# Altium PCB Apollo_ES_Board-V1.1 1.PcbDoc (part 3 of 3)
Units mil, origin at the board's own origin, x right, y up, seen from the top; angles counter-clockwise.
Board outline 984.25 x 614.17 mil, 4 copper layers (Top, Inner Layer 2, Inner Layer 3, Bottom), stack 4.71 mil thick; 86 components, 58 nets, 348 pads, 1209 vias.
Unrouted connection lines stored in the file: 448.
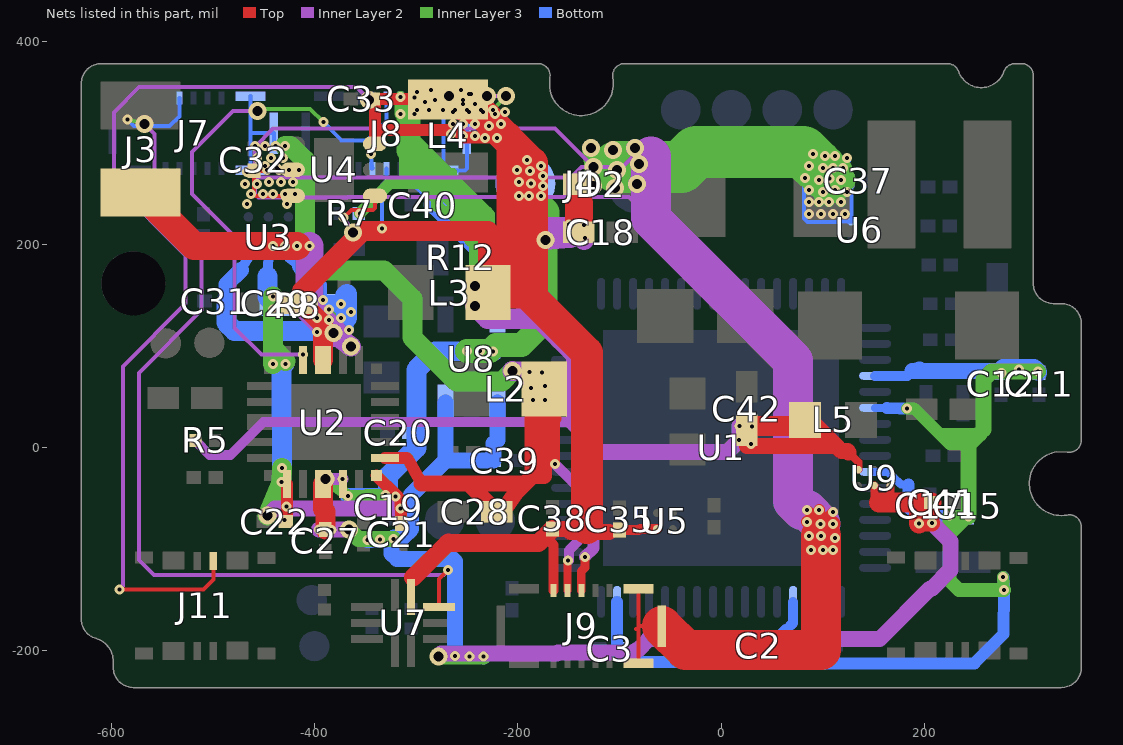
[diagram p5: the nets of this part, all layers, seen from the top]

## Via types
v1: diameter 9.84, hole 3.94, Top to Inner Layer 2, 528 vias
v2: diameter 9.84, hole 3.94, Inner Layer 3 to Bottom, 478 vias
v3: diameter 17.72, hole 9.84, Inner Layer 2 to Inner Layer 3, 198 vias
v4: diameter 17.72, hole 9.84, Top to Bottom, 5 vias

## Nets (pads, with @x,y where several pads share a name; then routed paths per layer and width w, separated by ;. In a path a pad name is that pad's centre, name@x,y a point inside that pad or via, vN(x,y) a via of type N, cw(c..) or ccw(c..) an arc to the next point about the centre after c; other vN are vias at no path point) (continued)
SW1_VDD1V8: C28.1 J7.13 J7.14 J7.16 J9.9 L2.2 U2.19 | length 1290.2
  Top w3.94: v1(-188.68,74.46) -174.16,59.94 v1(-173.23,61.02) ; L2.2@-176.29,58.03 v1(-176.29,73.92)
  Top w7.87: J9.9@-151.4,-140.49 -151.4,-111.52 v1(-150.6,-110.72)
  Top w9.84: v1(-173.23,47.24) L2.2@-174.16,45.42 ; v1(-173.23,61.02) L2.2@-174.16,58.03 ; v1(-163.38,-16.21) -163.38,27.19 -162.12,28.45 L2.2@-162.12,33.38 ; L2.2@-174.16,45.42 L2.2@-174.16,58.03 ; L2.2@-174.16,45.42 L2.2@-162.12,33.38 ; L2.2@-174.16,58.03 L2.2@-162.12,33.38
  Top w11.48: L2.2@-176.29,58.03 L2.2@-174.16,58.03
  Top w11.81: U2.19@-330.9,-10.13 -309.17,-10.13 -294.73,-35.2
  Top w11.94: L2.2@-174.16,58.03 L2.2@-174.16,59.94
  Top w12.09: L2.2@-174.16,45.42 L2.2@-174.16,47.24
  Top w13.89: L2.2@-174.16,47.24 v1(-173.23,47.24)
  Top w14.29: L2.2@-185.51,46.69 v1(-185.04,47.24)
  Top w15.75: -294.73,-35.2 -248.43,-35.2 ; v1(-185.04,47.24) L2.2@-174.16,58.03 ; L2.2@-174.16,45.42 -174.16,-27.55 -185.51,-27.55 ; L2.2@-174.16,47.24 L2.2@-174.16,58.03 ; -248.43,-35.2 C28.1@-220.78,-62.82 -214.99,-62.82 -202.27,-44.31 -193.16,-35.2 ; -248.43,-35.2 -193.16,-35.2 ; -193.16,-35.2 -185.51,-27.55 ; -185.51,-27.55 -185.51,46.69 L2.2@-174.16,58.03
  Inner Layer 2 w9.84: v1(-163.38,-16.21) -140.33,-39.26 -140.33,-91.48 -149.73,-100.88 -149.73,-110.72 v1(-150.6,-110.72)
  Inner Layer 2 w11.81: v1(-188.68,74.46) v1(-176.29,73.92)
  Inner Layer 2 w19.68: v3(-205.31,75.51) v1(-188.68,74.46)
  Inner Layer 3 w9.84: v2(-438.59,296.98) v2(-429.13,297.24)
  Inner Layer 3 w19.68: v2(-429.13,297.24) -423.67,296.98 -409.84,283.15 -409.84,191.05 -393.25,174.46 -331.65,174.46 -304.02,146.83 -304.02,108.55 -260.51,65.04 -215.78,65.04 v3(-205.31,75.51)
  Bottom w3.94: J7.14@-463.06,272.95 -463.06,309.7 ; J7.13@-463.06,346.14 -463.06,309.7 ; v2(-438.59,296.98) -440.23,296.98 J7.16@-440.23,309.7 -463.06,309.7
  other v1: -187.01,59.06
  other v2: -437.01,275.59 -448.82,277.56 -456.69,285.43 -442.91,285.43 -431.1,285.43 -458.66,297.24 -448.82,297.24
SW2_VDD3V3: C29.2 C33.1 C35.2 C38.1 J8.13 J8.14 J8.16 J9.10 L3.2 L4.1 U2.3 U4.6 U5.A2 U7.1 | length 2208.9
  Top w3.94: U7.1@-305.23,-146.86 -303.26,-146.86 U7.1@-303.26,-131.11 ; L4.1@-249.24,342.96 -263.66,348.22 v1(-246.15,348.22) ; -108.62,-80.98 C35.2@-100.28,-80.98
  Top w9.84: v1(-291.34,340.55) -291.34,343.43 L4.1@-268.93,342.96 ; v1(-281.5,342.52) L4.1@-268.93,342.96 ; v1(-273.62,332.68) L4.1@-268.93,342.96 ; -269.14,-93.72 -263.7,-93.03 -268.45,-93.03 ; v1(-255.91,352.36) L4.1@-249.24,342.96 ; -173.41,-87.33 -165.18,-95.57 J9.10@-165.18,-140.49 ; C35.2@-100.28,-80.98 -81.09,-80.98 -80.09,-79.98 U5.A2@-63.34,-79.98
  Top w9.99: v1(-281.5,342.52) L4.1@-281.5,343.43
  Top w10.63: -110.43,-82.79 -108.62,-80.98
  Top w10.91: L4.1@-237.59,331.31 v1(-224.41,332.68)
  Top w10.94: L4.1@-268.93,342.96 v1(-261.81,332.68)
  Top w10.97: U7.1@-303.26,-131.11 -303.16,-127.74
  Top w11.81: U4.6@-340.7,299.16 -340.7,312.68 ; -211.49,305.2 -253.07,305.2 -260.55,312.68 -340.7,312.68 ; -340.7,312.68 -340.7,341.17 C33.1@-342.97,343.43 L4.1@-291.34,343.43 ; L4.1@-291.34,343.43 L4.1@-268.93,342.96 -268.93,343.43 -281.5,343.43 L4.1@-291.34,343.43
  Top w15.75: C38.1@-166.16,-80.07 -150.9,-80.07 ; -132.18,-78.94 -136.03,-82.79 ; -110.43,-82.79 -136.03,-82.79 ; -150.9,-80.07 -136.03,-82.79 ; -150.9,-80.07 -148.18,-82.79 -136.03,-82.79
  Top w15.89: v1(-250,332.68) L4.1@-249.24,342.96
  Top w16.34: -263.7,-93.72 -263.7,-93.03
  Top w17.72: -303.16,-127.74 -269.14,-93.72 ; C38.1@-166.16,-80.07 -173.41,-87.33 -179.8,-93.72 -263.7,-93.72 ; -269.14,-93.72 -263.7,-93.72 ; -269.14,-93.72 -268.45,-93.03 -263.7,-93.72
  Top w19.29: L4.1@-249.24,342.96 v1(-246.15,348.22)
  Top w19.68: C29.2@-417.44,142.21 C29.2@-412.52,142.21 ; U2.3@-391.92,86.33 -391.92,121.61 C29.2@-412.52,142.21 ; -211.49,305.2 -211.49,170.79 L3.2@-229.53,152.75 -229.53,213.17 -353.41,213.17 -412.52,154.06 C29.2@-412.52,142.21
  Top w20.97: L4.1@-268.93,342.96 L4.1@-263.66,348.22
  Top w22.07: v1(-253.94,342.52) L4.1@-249.24,342.96
  Top w27.62: L4.1@-237.59,331.31 v1(-236.22,332.68)
  Top w31.5: v1(-253.94,342.52) L4.1@-268.93,342.96 L4.1@-237.59,331.31 ; L4.1@-249.24,342.96 L4.1@-237.59,331.31 ; L3.2@-229.53,152.75 -191.49,152.75 -186.38,157.86 ; -132.18,-78.94 -132.18,93.57 -186.38,147.77 -186.38,157.86 ; L4.1@-237.59,331.31 -211.49,305.2 -186.38,280.09 -186.38,157.86
  Inner Layer 2 w3.94: v1(-246.15,348.22) -244.16,346.23 v3(-230.31,346.46) v3(-211.56,346.23)
  Inner Layer 3 w3.94: v2(-248.03,348.43) v2@-234.25,334.65 ; v2(-234.25,330.71) v2@-234.25,334.65 ; v3(-211.56,346.23) -223.14,334.65 v2@-234.25,334.65
  Bottom w3.94: v2(-253.94,338.58) v2@-254.7,337.82 ; v2(-248.03,330.71) v2@-250.23,333.34 ; v2(-248.03,348.43) -273.06,348.43 J8.13@-273.06,346.14 ; -273.06,312.55 v2@-264.2,312.55 ; -273.06,312.55 J8.13@-273.06,346.14 ; -273.06,312.55 J8.14@-273.06,272.95 -252.2,272.95 -250.23,274.92 J8.16@-250.23,309.7 ; J8.13@-273.06,346.14 -263.02,346.14 v2@-254.7,337.82 ; v2@-264.2,312.55 v2(-265.75,309.06) v2@-261.35,309.7 ; v2@-264.2,312.55 v2@-261.35,309.7 ; v2@-261.35,309.7 J8.16@-250.23,309.7 ; v2@-254.7,337.82 v2@-250.23,333.34 ; J8.16@-250.23,309.7 v2@-250.23,333.34
  other v1: -299.21,332.68 -287.4,332.68 -299.21,350.39 -285.43,352.36
  other v2: -232.28,305.12 -220.47,305.12 -253.94,307.09 -242.13,307.09 -228.35,316.93 -263.78,318.9 -253.94,318.9 -242.13,318.9 -216.54,318.9 -222.44,328.74 -263.78,330.71 -212.6,330.71 -242.13,338.58
  other v3: -267.72,346.46
SYS_RST: J8.3 U2.4 | length 526.2
  Top w3.94: U2.4@-411.61,86.33 v1(-411.61,91.63)
  Inner Layer 2 w3.94: v3(-456.5,331.6) -480.31,331.6 -520.62,291.3 -520.62,249.73 -478.78,207.89 -478.78,118.11 -452.3,91.63 v1(-411.61,91.63)
  Inner Layer 3 w3.94: v3(-456.5,331.6) -454.44,333.66 -404.54,333.66 v2(-391.58,320.7)
  Bottom w3.94: v2(-391.58,320.7) -373.54,302.66 -364.45,302.6 -348.43,302.6 -329.55,321.47 J8.3@-329.55,344.47
TMP: J8.9 J11.2 | length 981.6
  Top w3.94: v1(-592.38,-139.54) -509.68,-139.54 -499.9,-129.76 J11.2@-499.9,-111.47
  Inner Layer 2 w3.94: v1(-592.38,-139.54) -588.9,-136.06 -588.9,80.02 -527.02,141.9 -527.02,189.32 -597.71,260.01 -597.71,329.99 -572.77,354.93 -358.98,354.93 v3(-346.48,342.43)
  Inner Layer 3 w3.94: v3(-346.48,342.43) -344.49,340.44 v2(-344.49,289.37)
  Bottom w3.94: v2(-344.49,289.37) J8.9@-344.32,279.06 ; J8.9@-344.32,279.06 J8.9@-343.33,274.63 -344.32,274.63 J8.9@-344.32,279.06
TX: J7.2 U7.10 | length 923.3
  Top w3.94: U7.10@-277.67,-156.71 -277.67,-129.4 v1(-268.79,-120.52)
  Inner Layer 2 w3.94: v3(-567.52,318.55) -557.96,308.99 -557.96,242.53 -511.27,195.84 -511.27,135.38 -572.98,73.67 -572.98,-110.29 -558.04,-125.23 -273.5,-125.23 v1(-268.79,-120.52)
  Inner Layer 3 w3.94: v2(-584.36,323.09) v3(-567.52,318.55)
  Bottom w3.94: v2(-584.36,323.09) -577.89,316.62 -542.82,316.62 -533.33,326.11 J7.2@-533.33,344.47
V_CHG_IN: C18.1 C19.2 C20.1 D2.1 J4.1 U2.16 | length 1072.8
  Top w3.94: v1(-372.7,-30.6) -372.24,-30.6 U2.16@-372.24,-35.72 ; v1(-148.33,206.37) -142.4,212.3 C18.1@-140.14,212.3 ; C18.1@-134.77,212.3 v1(-134.77,219.19)
  Top w9.84: v1(-149.65,219.53) C18.1@-140.14,219.53 ; v1(-148.33,206.37) C18.1@-140.14,212.3
  Top w10.01: C18.1@-140.14,212.3 v1(-133.79,206.25)
  Top w12.42: C18.1@-142.4,212.3 C18.1@-140.14,219.53
  Top w15.75: -140.14,240.74 D2.1@-140.14,259.25
  Top w16.82: C18.1@-134.77,212.3 C18.1@-140.14,212.3 v1(-134.77,219.19)
  Top w21.26: C18.1@-140.14,212.3 C18.1@-140.14,219.53
  Top w27.56: C18.1@-140.14,219.53 -140.14,240.74
  Inner Layer 2 w3.94: v1(-148.33,206.37) v1(-149.65,219.53) v1@-147.76,217.41
  Inner Layer 2 w9.84: v1(-148.33,206.37) v1@-147.76,217.41
  Inner Layer 2 w11.81: v3(-389.26,-30.75) v1(-372.7,-30.6)
  Inner Layer 2 w17.72: v1@-134.77,204.42 v1(-133.79,206.25)
  Inner Layer 2 w19.68: v1(-148.33,206.37) v3(-173.12,204.31) -173.12,217.41 -147.76,217.41 -134.77,204.42 v1(-134.77,219.19)
  Inner Layer 3 w9.84: v2(-224.81,94.93) -221.67,101.11 ; v2(-200.79,273.62) v2(-188.05,272.38) ; v2(-198.82,248.03) -188.05,247.07 v2(-187.42,259.96) ; v2(-198.82,261.81) -188.05,259.96 v2(-175.2,257.87) ; v2(-190.94,283.46) v2(-188.05,272.38) ; v2(-177.17,277.56) v2(-188.05,272.38) ; v2(-175.2,267.72) v2(-188.05,272.38)
  Inner Layer 3 w10.81: v2@-188.05,247.07 v2(-177.17,248.03)
  Inner Layer 3 w11.81: v3(-389.26,-30.75) v2(-367.16,-47.32) -349.38,-47.32 -348.39,-46.33 v2(-330.61,-46.33)
  Inner Layer 3 w19.32: v2@-227.72,95.06 v2(-224.81,94.93)
  Inner Layer 3 w23.62: v2(-250.23,95.06) v2(-237.5,95.24) -227.72,95.06 -221.67,101.11 -196.64,101.11 -173.12,124.63 v3(-173.12,204.31)
  Inner Layer 3 w24.89: v2(-188.98,248.03) v2@-188.05,247.07
  Inner Layer 3 w26.3: v2@-188.05,259.96 v2(-187.42,259.96)
  Inner Layer 3 w27.56: v2(-188.05,272.38) -188.05,259.96 -188.05,247.07 -173.12,232.14 v3(-173.12,204.31)
  Bottom w3.94: v2(-330.61,-46.33) C19.2@-329.54,-47.22 ; C19.2@-327.87,-45.55 C19.2@-327.09,-47.66 ; v2(-188.05,272.38) J4.1@-192.71,260 v2(-187.42,259.96)
  Bottom w6.05: C20.1@-306.87,15.01 C20.1@-300.05,15.06
  Bottom w9.84: v2(-250.23,95.06) -242.47,95.24
  Bottom w11.76: v2@-254.19,95.06 v2(-250.23,95.06)
  Bottom w13.08: C19.2@-330.61,-47.66 v2(-330.61,-46.33)
  Bottom w13.99: v2(-330.61,-46.33) C19.2@-327.87,-45.55
  Bottom w15.75: v2(-367.16,-47.32) -330.61,-47.66 -329.54,-47.22 C19.2@-327.09,-47.66
  Bottom w19.68: C19.2@-329.54,-47.22 -327.87,-45.55 -327.87,-27.83 -300.05,-0.01 ; v2@-254.19,95.06 -281.83,94.93 -300.05,76.71 ; v2(-250.23,95.06) -242.78,94.93 ; v2(-224.81,94.93) v2(-237.5,95.24) ; -300.05,-0.01 -300.05,15.06 -300.05,76.71 ; -300.05,-0.01 -300.05,76.71 ; -242.78,94.93 -242.47,95.24 v2(-237.5,95.24) ; -242.78,94.93 v2(-237.5,95.24)
VBAT: C31.1 J3.1 R8.2 U3.C1 U3.C3 | length 886.7
  Top w9.84: v1(-440.94,198.82) v1(-429.13,198.82) ; v1(-429.13,198.82) v1(-417.64,198.46) v1(-405.22,198.77)
  Top w27.56: J3.1@-571.52,251.25 -519.04,198.77 v1(-440.94,198.82) v1(-429.13,198.82) v1(-417.64,198.46)
  Inner Layer 2 w9.84: v1(-417.64,198.46) v1(-405.22,198.77)
  Inner Layer 2 w19.68: v3(-381.75,112.94) v3(-364.46,99.58)
  Inner Layer 2 w27.56: v1(-405.22,198.77) -405.22,136.41 v3(-381.75,112.94)
  Inner Layer 3 w3.94: v2(-385.83,125.98) v2@-381.75,126.96 ; v2(-385.81,135.84) -380.94,130.97 -380.94,127.77 v2@-381.75,126.96 ; v3(-381.75,112.94) v2@-381.75,126.96
  Inner Layer 3 w15.75: v3(-381.75,112.94) v3(-364.46,99.58)
  Bottom w3.94: R8.2@-395.75,135.84 v2(-385.81,135.84)
  Bottom w6.49: R8.2@-395.75,135.84 R8.2@-395.75,140.47
  Bottom w9.84: -472.81,174.88 U3.C3@-465.29,187.82 ; U3.C1@-425.92,187.82 -414.61,178.75 ; v2(-397.64,114.17) -397.87,120.52 v2(-397.64,127.95) ; R8.2@-385.81,140.47 v2(-391.73,145.67) ; v2@-370.36,140.47 v2(-364.17,133.86) ; -370.08,149.61 v2(-374.02,141.73) -368.11,140.47 v2(-364.17,133.86) ; v2(-366.14,116.14) -368.11,127.76 v2(-364.17,133.86) ; v2(-391.73,145.67) -397.87,138.35 v2(-401.57,141.73) R8.2@-395.75,140.47 v2(-391.73,145.67)
  Bottom w10.38: -403.33,115.06 v2(-397.64,114.17)
  Bottom w10.42: v2(-385.81,135.84) R8.2@-385.81,140.47
  Bottom w11.06: v2(-374.02,127.95) -368.11,127.76
  Bottom w11.94: v2(-374.02,141.73) v2@-370.36,140.47
  Bottom w13.11: R8.2@-397.87,138.35 R8.2@-395.75,135.84
  Bottom w15.75: C31.1@-486.99,144.31 -486.99,160.7 -472.81,174.88 ; -414.61,178.75 -395.75,159.89 R8.2@-395.75,140.47 R8.2@-397.87,138.35
  Bottom w17.16: v2@-374.02,140.47 v2(-374.02,141.73)
  Bottom w17.91: v2(-397.64,114.17) v2@-397.64,115.06
  Bottom w19.68: C31.1@-486.99,144.31 -486.99,123.12 -478.93,115.06 -403.33,115.06 ; -397.87,120.52 -403.33,115.06 ; R8.2@-397.87,138.35 v2(-397.64,127.95) ; R8.2@-395.75,140.47 -385.81,140.47 -374.02,140.47 v2@-370.36,140.47 ; -403.33,115.06 -397.64,115.06 -380.81,115.06 -368.11,127.76 -368.11,140.47 ; v2@-370.36,140.47 -368.11,140.47 ; v2@-370.36,140.47 -370.08,149.61 ; -370.08,149.61 -368.11,140.47 ; -370.08,149.61 -368.11,151.57 -368.11,140.47
VBAT_VSYS: C21.2 C22.1 R8.1 U2.13 U2.18 U3.C2 | length 670
  Top w3.94: C22.1@-428.44,-72.58 C22.1@-427.35,-72.58 ; v1(-427.9,-57.59) v1@-427.9,-53.78
  Top w9.84: C22.1@-428.44,-72.58 v1(-429.95,-70.96) C22.1@-427.35,-72.58 ; v1(-427.9,-57.59) v1@-427.35,-53.23 ; v1(-320.57,-47.84) v1@-320.57,-46.05
  Top w10.72: v1(-427.9,-57.59) v1@-427.35,-57.59 ; v1@-427.9,-53.78 v1@-427.35,-53.23
  Top w10.79: v1(-315.4,-59.85) v1@-314.89,-59.85
  Top w11.81: C22.1@-427.35,-72.58 -427.35,-57.59 -427.35,-53.23 U2.13@-427.35,-35.72 ; U2.18@-339.36,-27.25 -320.57,-46.05 -314.89,-51.73 ; v1(-315.4,-59.85) -315.4,-52.24 -314.89,-51.73 ; C21.2@-314.89,-74.52 -314.89,-59.85 -314.89,-51.73
  Inner Layer 2 w3.94: v1@-430.87,-59.85 v1@-428.61,-57.59 ; v1@-429.95,-60.77 v1@-428.61,-57.59 ; v1(-427.9,-57.59) v1@-428.61,-57.59
  Inner Layer 2 w9.84: v1(-429.95,-70.96) v1@-429.95,-60.77 ; v1@-429.95,-60.77 v1(-427.9,-57.59) -430.87,-59.85 v1@-429.95,-60.77
  Inner Layer 2 w11.81: v1(-320.57,-47.84) v1(-315.4,-59.85)
  Inner Layer 2 w15.75: v3(-446.32,-66.82) -439.35,-59.85 -430.87,-59.85 v1(-315.4,-59.85)
  Inner Layer 3 w13.64: v2(-428.79,82.42) v2@-428.79,85.44
  Inner Layer 3 w19.68: v3(-446.32,-66.82) v2(-432.67,-33.66) v2(-432.18,-19.82) ; v2(-441.16,82.65) -441.16,97.81 ; v2(-441.16,148.72) v2(-441.16,135.84) -441.16,97.81 ; v2@-428.79,85.44 -441.16,97.81
  Bottom w3.94: R8.1@-446.42,148.22 R8.1@-441.16,140.47 ; v2(-441.16,135.84) R8.1@-441.16,137.98 ; v2(-441.16,148.72) R8.1@-441.16,140.47 ; R8.1@-438.67,140.47 R8.1@-441.16,140.47
  Bottom w9.84: R8.1@-446.42,148.22 v2(-441.16,148.72) ; -446.42,168.69 U3.C2@-445.61,187.82 ; v2(-441.16,82.65) v2@-432.67,80.06 ; v2(-441.16,135.84) R8.1@-438.67,140.47
  Bottom w10.6: v2@-432.67,80.06 v2(-428.79,82.42)
  Bottom w12.64: R8.1@-441.16,137.98 R8.1@-438.67,140.47
  Bottom w17.51: v2@-429.66,83.07 v2(-428.79,82.42)
  Bottom w18.5: v2(-441.16,82.65) v2@-440.74,83.07
  Bottom w19.68: -446.42,168.69 -446.42,148.22 R8.1@-438.67,140.47 ; v2(-432.67,-33.66) v2(-432.18,-19.82) v2@-432.67,80.06 ; v2@-432.67,80.06 -440.74,83.07 -429.66,83.07 v2@-432.67,80.06
VCC_1V8: C40.1 J8.6 R12.2 U8.5 | length 202.1
  Bottom w12.99: J8.6@-302,274.63 -302,264.36 -296.38,258.74 -296.04,258.74 -283.04,245.73 ; C40.1@-283.04,239.59 -283.04,245.73 ; C40.1@-281.5,239.59 -283.04,245.73
  Bottom w16.35: C40.1@-283.04,238.94 C40.1@-281.5,239.59
  Bottom w18.37: C40.1@-283.04,238.94 C40.1@-283.04,239.59
  Bottom w19.68: C40.1@-283.04,239.59 -281.5,239.59 R12.2@-230.03,188.12 ; U8.5@-220.33,130.99 -220.33,158.55 ; R12.2@-230.03,188.12 -230.03,187.28 R12.2@-228.91,187.28 ; R12.2@-230.03,188.12 R12.2@-228.91,187.28 ; -228.91,159.72 -220.33,158.55 ; -228.91,159.72 -220.9,159.13 -220.33,158.55 ; -228.91,159.72 R12.2@-228.91,187.28
VCC_3V3: C27.1 C39.1 C41.1 U2.15 U8.1 U8.3 U9.B1 U9.C1 | length 1442.9
  Top w3.94: v1(-396.01,-80.65) -389.68,-80.65 C27.1@-389.68,-80.51
  Top w7.87: C27.1@-389.68,-80.51 -389.68,-81.03 v1(-383.67,-81.03) ; U9.B1@150.67,-37.29 150.67,-53.12 156.03,-53.12 155.35,-53.8 ; U9.C1@166.42,-37.29 166.42,-53.46 166.76,-53.8
  Top w15.75: v1@194.87,-74.32 207.63,-74.32 v1(207.63,-74.17) 206.84,-74.17 C41.1@206.84,-53.8
  Top w19.68: U2.15@-391.92,-35.72 -391.92,-60.26 -389.68,-62.5 C27.1@-389.68,-80.51 ; 155.35,-53.8 166.76,-53.8 192.91,-53.8 ; v1(194.87,-74.69) 194.87,-74.32 194.87,-55.75 192.91,-53.8 ; C41.1@206.84,-53.8 192.91,-53.8
  Inner Layer 2 w15.75: v1(-396.01,-80.65) v3(-366.22,-80.67) ; v3(-278.38,-205.52) -275.58,-202.72 -161.42,-202.72 -160.41,-201.71 -148.13,-201.71 -86.95,-201.71 -86.08,-200.84 -85.57,-200.84 -85.15,-200.42 -84.83,-200.42 -84.51,-200.1 -84.23,-200.1 -83.86,-199.73 -83.5,-199.73 -82.88,-199.11 -82.28,-199.11 -71.39,-188.22 156.05,-188.22 205.98,-138.29 207.55,-138.29 225.67,-120.17 225.67,-92.21 v1(207.63,-74.17) v1@194.45,-74.17
  Inner Layer 3 w15.75: v3(-366.22,-80.67) -357.13,-89.76 v2(-322.35,-89.76) ; v3(-278.38,-205.52) -278.38,-205.38 -256.58,-205.38 ; v2(-262.11,-205.09) -256.87,-205.09 -256.58,-205.38 ; v2(-234.03,-205.27) v2(-247.6,-205.27) -256.47,-205.27 -256.58,-205.38
  Bottom w3.94: v2@-323.36,-89.76 v2(-322.35,-89.76)
  Bottom w15.75: v2(-348.11,-90.92) v2@-324.52,-90.92 ; v2(-335.74,-90.53) -324.91,-90.53 v2@-324.52,-90.92 ; U8.3@-271.51,44.37 -271.51,-12.63 ; v2(-234.03,-205.27) -234.03,-205.18 -262.11,-205.18 v2(-262.11,-205.09) -262.11,-111.88 -264.53,-109.46 -318.99,-109.46 -324.52,-103.93 v2@-324.52,-90.92 ; U8.1@-220.33,44.37 -220.33,7.6 -223.9,4.03 C39.1@-223.9,-12.63 -271.51,-12.63 ; v2@-324.52,-90.92 -323.36,-89.76 -321.92,-88.32 -313.56,-88.32 -305.22,-79.98 -305.22,-46.35 -271.51,-12.63
VDD5V_EN: J8.8 U4.4 | length 154.6
  Top w3.94: v1(-371.49,226.51) -364.02,233.98 -342.52,233.98 -340.7,235.8 U4.4@-340.7,247.98
  Inner Layer 2 w3.94: v1(-371.49,226.51) v3(-362.27,211.85)
  Inner Layer 3 w3.94: v3(-362.27,211.85) -339.83,211.85 v2(-333.95,215.71)
  Bottom w3.94: v2(-333.95,215.71) -333.95,258.52 -329.24,263.23 -329.24,274.32 J8.8@-329.55,274.63
VDD_1V9: C42.2 J8.4 J8.5 J9.8 L5.1 R5.2 R7.2 U9.A2 | length 2482.5
  Top w3.94: v1(17.72,7.87) 25.34,7.87 C42.2@25.34,17.16 ; v1(18.13,21.34) 25.34,21.34 C42.2@25.34,17.16 ; v1(29.53,3.94) 29.53,17.16 C42.2@25.34,17.16 ; v1(30.49,20.99) 25.34,20.99 C42.2@25.34,17.16
  Top w7.87: 125.49,-4.53 134.92,-13.96 U9.A2@134.92,-21.54
  Top w8.66: J9.8@-137.62,-140.49 -137.62,-121.61 -134.17,-118.17 v1(-134.17,-107.37)
  Top w15.75: C42.2@25.34,17.16 25.34,1.93 111.31,1.93 112.2,2.83 ; L5.1@82.67,27.52 82.67,25.55 89.48,25.55 112.2,2.83 ; 125.49,-4.53 124.23,-3.27 118.3,-3.27 112.2,2.83
  Top w19.68: C42.2@25.34,17.16 25.34,21.52 82.67,21.52 L5.1@82.67,27.52
  Inner Layer 2 w9.84: v1(-517.43,7.27) -517.65,7.05 -503.56,-7.04 -482.88,-7.04 -450.4,25.44 -150.73,25.44 -138.68,13.39 -138.68,0.66
  Inner Layer 2 w11.81: -217.31,165.44 -198.28,165.44 -126.3,93.46 -126.3,74.43 ; -142.92,24.39 -138.68,20.15 -138.68,13.39 ; -142.92,91.05 -126.3,74.43 ; -138.68,-3.94 -138.68,-16.25 -125.57,-29.36 ; v1(-134.17,-107.37) -125.57,-98.77 -125.57,-29.36 ; -126.3,74.43 -125.57,73.7 -125.57,-3.94 -125.57,-29.36
  Inner Layer 2 w15.75: v3(-242.47,158.99) v3(-242.47,139.34) -234.97,146.84 ; -138.68,0.66 -138.68,-3.94 -125.57,-3.94 6.41,-3.94 18.13,7.78 v1(18.13,21.34) v1@28.18,21.34
  Inner Layer 2 w16.6: -216.59,145.3 -216.59,146.84
  Inner Layer 2 w19.68: v3(-242.47,139.34) -229.94,126.81 -178.68,126.81 ; v3(-242.47,158.99) -217.31,165.44 -198.71,146.84 ; -234.97,146.84 -216.59,146.84 -198.71,146.84 ; -142.92,24.39 -142.92,91.05 -178.68,126.81 ; -198.71,146.84 -178.68,126.81
  Inner Layer 3 w3.94: v2(-315.78,328.73) -309.9,328.73
  Inner Layer 3 w7.87: v2(-302,328.41) -302,306.47 -267.18,271.65 -263.78,271.65 -263.78,267.34 -230.31,233.87 -229.94,233.87 -226.38,230.31 -226.38,155.43 v3(-242.47,139.34)
  Inner Layer 3 w9.84: v2(-315.78,328.73) -307.64,326.47
  Inner Layer 3 w11.69: -307.64,326.47 v2(-302,328.41)
  Inner Layer 3 w11.81: v2(-355.67,230.71) -325.71,260.67 -311.02,260.67 ; v2(-315.78,328.73) v2(-315.78,345.12) ; -307.64,292.78 -311.02,289.4 -311.02,275.59 ; v2(-302,328.41) v2(-302,344.81) ; v3(-242.47,158.99) -242.47,207.89 -266.86,232.28 -273.62,232.28 -279.53,238.19 -279.53,244.09 -311.02,275.59 ; -242.47,227.61 -242.47,231.33 -271.81,260.67 -311.02,260.67 ; -311.02,260.67 -311.02,275.59
  Inner Layer 3 w15.75: v3(-242.47,139.34) v3(-242.47,158.99)
  Inner Layer 3 w17.23: -309.9,328.73 -307.64,326.47
  Inner Layer 3 w18.36: -273.67,258.81 -271.81,260.67
  Inner Layer 3 w23.62: -307.64,326.47 -307.64,292.78 -273.67,258.81 -242.47,227.61 -242.47,207.89
  Bottom w3.94: R7.2@-356.68,230.71 v2(-355.67,230.71)
  Bottom w7.87: v2(-315.78,328.73) J8.4@-315.78,344.47 v2(-315.78,345.12) ; v2(-302,328.41) v2(-302,344.81)
VDD_5V: C32.1 C37.2 J9.13 J9.14 J9.16 U4.2 U4.3 U6.A2 | length 3581
  Top w3.94: v1(-459.02,271.71) C32.1@-459.93,272.62 ; v1(-435.04,273.62) v1(-435.04,273.62) ; v1(-425.2,273.62) v1(-425.2,273.62) ; U4.3@-421.68,247.98 v1@-458.32,247.98 ; U4.2@-421.68,273.57 v1(-425.2,273.62) ; -83.64,-178.31 -81.12,-178.31 ; J9.13@-81.12,-212 -81.12,-178.31 ; J9.14@-81.12,-138.81 -81.12,-175.56 ; J9.16@-58.29,-175.56 -81.12,-175.56 ; v1@-459.93,249.59 v1@-458.32,247.98 ; v1@-459.93,249.59 v1(-462.6,250) v1@-458.32,247.98 ; v1@-459.93,249.59 C32.1@-459.93,272.62 ; C32.1@-459.93,272.62 v1@-446.85,272.62 ; v1@-446.85,272.62 v1@-444.07,272.62 ; v1@-446.85,272.62 v1(-446.85,273.62) ; v1(-446.85,273.62) v1@-444.07,272.62 ; v1(-446.85,273.62) v1@-443.12,273.57 ; v1@-444.07,272.62 v1@-443.12,273.57 ; v1@-443.12,273.57 v1(-435.04,273.62) ; v1(-435.04,273.62) v1(-425.2,273.62) ; -81.12,-178.31 -81.12,-175.56
  Top w9.84: v1(84.65,-72.83) v1(98.43,-86.61) ; v1(84.65,-61.02) v1(98,-74.84) v1(110.24,-62.99) ; v1(110.24,-100.39) v1(98.43,-86.61) ; v1(110.24,-74.8) v1(98.43,-86.61)
  Top w11.31: v1(98.43,-86.61) v1(112.2,-88.58)
  Top w11.45: v1(98.43,-86.61) v1(100.39,-100.39)
  Top w11.57: v1(96.46,-61.02) v1(98,-74.84)
  Top w11.63: 98.42,-107.65 v1(110.24,-100.39)
  Top w12.36: v1(84.65,-72.83) v1(98,-74.84)
  Top w14.9: v1(98,-74.84) v1(110.24,-74.8)
  Top w15.55: v1@98.32,-100.42 v1(110.24,-100.39)
  Top w15.81: v1(98,-74.84) v1(98.43,-86.61)
  Top w16.3: v1(86.61,-86.61) v1(98.43,-86.61)
  Top w19.89: v1(88.58,-100.39) 98.42,-107.65
  Top w24.34: 98.42,-107.65 v1(100.39,-100.39)
  Top w35.23: v1@98.32,-100.42 v1(100.39,-100.39)
  Top w39.37: J9.16@-58.29,-175.56 -34.87,-198.98 98.42,-198.98 98.42,-107.65 98.32,-100.42 v1(98.43,-86.61)
  Inner Layer 2 w3.94: v1(-462.6,250) v1@-459.02,249.95 ; v3(-102.36,273.62) v3@-96.96,276.44 ; -68.95,225.43 -90.49,246.97 -367.68,246.97 -368.52,246.13 -455.2,246.13 v1@-459.02,249.95 ; -68.95,286.52 -86.88,286.52 v3@-96.96,276.44 ; v1@-459.02,249.95 -459.02,265.77 ; -459.02,265.77 v1(-459.02,271.71) ; -459.02,265.77 -457.11,265.77 ; -459.02,265.77 -458.07,266.73 ; v1(-459.02,271.71) -458.07,270.76 -458.07,266.73 ; v1(-459.02,271.71) -459.02,296.07 -440.93,314.16 -163.44,314.16 v3(-125.72,276.44) ; -458.07,266.73 -457.11,265.77 ; -457.11,265.77 -148.22,265.77 -137.55,276.44 v3(-125.72,276.44) ; v3(-125.72,276.44) v3@-96.96,276.44
  Inner Layer 2 w9.84: v1(86.61,-86.61) v1(98,-74.84) v1(110.24,-62.99)
  Inner Layer 2 w14.9: v1(98,-74.84) v1(110.24,-74.8)
  Inner Layer 2 w15.81: v1(98,-74.84) v1(98.43,-86.61)
  Inner Layer 2 w17.72: v3(-84.65,295.28) -68.95,286.52 ; v3(-82.68,259.84) -68.95,286.52 ; v3(-80.71,279.53) -68.95,286.52
  Inner Layer 2 w22.01: v1(96.46,-61.02) v1(98,-74.84)
  Inner Layer 2 w23.32: v1(84.65,-72.83) v1(84.65,-61.02)
  Inner Layer 2 w39.37: -68.95,286.52 -68.95,225.43 70.87,85.61 70.87,-52.49 79.5,-61.12 v1(84.65,-61.02) v1(98,-74.84)
  Inner Layer 3 w9.84: v2(82.68,265.75) 80.78,291.13 v2(100.39,275.59) ; v2(86.61,253.94) v2(106.83,265.08) ; 90.48,281.43 98.36,273.55 v2(100.39,251.97) ; v2(96.46,242.13) v2(106.83,265.08) ; v2(106.3,242.13) v2(106.83,265.08) ; v2(118.11,242.13) v2(106.83,265.08) ; v2(124.02,251.97) v2(106.83,265.08)
  Inner Layer 3 w9.99: 90.48,281.43 v2(110.24,275.59)
  Inner Layer 3 w12.01: v2(106.83,265.08) v2(112.2,287.4)
  Inner Layer 3 w17.36: v2(106.83,265.08) v2(120.08,275.59)
  Inner Layer 3 w17.72: v3(-127.95,295.28) v3(-125.72,276.44) ; v3(-125.98,257.87) v3(-125.72,276.44) ; v3(-106.3,293.31) v3@-102.36,276.44 ; v3(-104.33,255.91) v3@-102.36,276.44 ; v3(-84.65,295.28) v3@-102.36,276.44 ; v3(-80.71,279.53) v3@-102.36,276.44 ; v3(-125.72,276.44) v3@-102.36,276.44
  Inner Layer 3 w17.97: v2(82.68,265.75) v2(106.83,265.08)
  Inner Layer 3 w17.99: v3@-102.36,276.44 v3(-82.68,259.84)
  Inner Layer 3 w21.64: 80.78,291.13 v2(86.61,277.56)
  Inner Layer 3 w21.97: v2(100.39,251.97) v2(106.83,265.08)
  Inner Layer 3 w25.93: 80.78,291.13 v2(102.36,287.4)
  Inner Layer 3 w26.44: v2(106.83,265.08) v2(112.2,253.94)
  Inner Layer 3 w27.08: v2@98.36,273.55 v2(110.24,275.59)
  Inner Layer 3 w27.21: v2@98.36,273.55 v2(106.83,265.08)
  Inner Layer 3 w28.18: 90.48,281.43 v2(100.39,275.59)
  Inner Layer 3 w28.47: v2(106.83,265.08) v2(118.11,263.78)
  Inner Layer 3 w31.32: 80.78,291.13 v2(90.55,289.37)
  Inner Layer 3 w31.5: v2(106.83,265.08) v2(110.24,275.59)
  Inner Layer 3 w34.67: v2(96.46,263.78) v2(106.83,265.08)
  Inner Layer 3 w35.3: 90.48,281.43 v2(90.55,289.37)
  Inner Layer 3 w40.24: v2(86.61,277.56) 90.48,281.43
  Inner Layer 3 w45.01: v3@-80.71,276.44 v3(-80.71,279.53)
  Inner Layer 3 w45.42: v2@98.36,273.55 v2(100.39,275.59)
  Inner Layer 3 w45.55: v3(-102.36,273.62) v3@-102.36,276.44
  Inner Layer 3 w51.18: v3@-102.36,276.44 -80.71,276.44 -39.41,276.44 -24.72,291.13 80.78,291.13 90.48,281.43
  Bottom w3.94: v2(82.68,265.75) v2@81.54,265.75 ; v2(106.83,265.08) 106.83,282.6 107.69,283.46 ; v2(124.02,285.43) v2@124.39,283.46 ; v2@81.54,265.75 81.54,225.51 84.85,222.2 113.86,222.2 114.27,222.61 U6.A2@128.09,222.61 128.09,258.56 C37.2@123.92,262.73 123.92,280.43 125.67,282.18 v2@124.39,283.46 ; v2@81.54,265.75 81.54,281.44 83.56,283.46 107.69,283.46 ; 107.69,283.46 v2@124.39,283.46
  other v1: -466.54,240.16 -427.17,240.16 -450.79,250 -440.94,250 -429.13,250 -419.29,250 -468.5,259.84 -456.69,259.84 -444.88,261.81 -433.07,261.81 -421.26,261.81 -466.54,271.65 -415.35,273.62
  other v2: 86.61,230.31 98.43,230.31 110.24,230.31 122.05,230.31 86.61,242.13
VDDA_1V8: C2.1 C3.1 C11.1 C12.2 C15.1 C17.1 U1.4 U1.15 U1.52 U1.54 U1.58 | length 1475.2
  Inner Layer 3 w11.81: v2(183.02,38.88) 189.82,38.88 214.92,13.78 ; v2(224.54,-66.47) v2(243.32,-67.47) ; 243.32,2.98 225.72,2.98 214.92,13.78 ; 258.4,18.06 254.12,13.78 214.92,13.78 ; v2(277.51,-127.38) v2(278.23,-139.9)
  Inner Layer 3 w11.85: v2@293.23,75.14 v2(293.23,77.09)
  Inner Layer 3 w12.29: v2(275.97,73.41) v2@275.97,75.14
  Inner Layer 3 w13.78: v2(224.54,-66.47) 224.54,-84.65 ; v2(243.32,-67.47) 241.72,-67.47 224.54,-84.65 ; v2(278.23,-139.9) 233.94,-139.9 224.54,-130.5 224.54,-84.65
  Inner Layer 3 w15.75: v2(243.32,-67.47) 243.32,2.98 254.12,13.78 ; 258.4,18.06 258.4,67.23 266.31,75.14 275.97,75.14 293.23,75.14 v2(311.74,75.14)
  Bottom w3.94: v2(224.54,-66.47) 225.34,-67.27 v2@225.34,-68.1 ; C15.1@242.69,-68.1 v2(243.32,-67.47) ; C12.2@277.38,79.65 v2(275.97,73.41) ; v2(311.74,75.14) C11.1@312.99,73.79 C11.1@312.99,74.66 ; v2(275.97,73.41) 277.38,73.79 C12.2@275.59,73.79 v2(275.97,73.41)
  Bottom w4.02: C12.2@277.38,73.79 C12.2@277.38,79.65
  Bottom w7.46: C12.2@273.36,75.63 C12.2@277.38,73.79
  Bottom w7.87: U1.58@151.57,-23.62 163.39,-23.62 169.43,-28.71 176.85,-36.13 184.46,-36.13 ; U1.54@151.57,39.37 U1.54@163.39,39.37
  Bottom w8.92: C12.2@273.36,75.63 v2(275.97,73.41)
  Bottom w9.84: 63.9,-179.26 70.87,-172.3 U1.4@70.87,-151.57 ; U1.52@151.57,70.87 183.39,70.87 188.15,75.63 ; C11.1@308,79.65 v2(311.74,75.14)
  Bottom w10.16: v2(224.54,-66.47) v2@225.34,-68.1
  Bottom w10.32: v2(277.51,-127.38) v2@278.03,-127.38
  Bottom w10.63: v2(293.23,77.09) v2@293.23,79.65
  Bottom w11.81: U1.15@-102.36,-151.57 -102.36,-194.18 C3.1@-98.76,-197.79 -85.51,-211.03 43.43,-211.03 ; 63.9,-179.26 C2.1@48.29,-194.7 ; U1.54@163.39,39.37 175.86,38.88 v2(183.02,38.88) ; 184.46,-36.13 184.46,-59.3 193.25,-68.1 C17.1@205.53,-68.1 ; v2@278.03,-127.38 v2(278.23,-139.9) 278.03,-183.18 249.11,-212.1 51.77,-212.1 ; 43.43,-211.03 51.77,-211.03 ; 43.43,-211.03 44.5,-212.1 51.77,-212.1 ; C2.1@48.29,-194.7 C2.1@47.42,-194.7 C2.1@51.77,-198.18 ; C2.1@48.29,-194.7 C2.1@51.77,-198.18 ; 51.77,-212.1 51.77,-211.03 ; 51.77,-211.03 C2.1@51.77,-198.18
  Bottom w12.76: C12.2@273.36,75.63 C12.2@275.59,73.79 C12.2@277.38,79.65
  Bottom w13.07: v2(311.74,75.14) C11.1@312.99,74.66
  Bottom w13.78: C17.1@205.53,-68.1 225.34,-68.1 C15.1@242.69,-68.1
  Bottom w14.65: v2(311.74,75.14) C11.1@312.13,75.53
  Bottom w15.75: C11.1@312.99,73.79 C11.1@308,79.65 ; 196.64,75.63 188.15,75.63 195.42,76.85 196.64,75.63 ; 196.64,75.63 273.36,75.63 277.38,79.65 293.23,79.65 C11.1@308,79.65 ; C11.1@308,79.65 312.99,74.66 312.13,75.53 C11.1@308,79.65
pads on no net: HOL1.1 J10.1 J10.2 J10.3 J10.4 J10.7 J10.8 J11.1 J11.4 J11.7 J11.8 U1.1 U1.5 U1.6 U1.10 U1.11 U1.12 U1.13 U1.14 U1.19 U1.20 U1.22 U1.23 U1.24 U1.25 U1.28 U1.29 U1.61 U1.62 U1.63 U1.64 U2.7 U2.8 U2.11 U2.14
copper on no net: | length 166.4
  Top w6: -516.39,-112.25 -515.65,-111.51
  Inner Layer 2 w0.1: 80.71,-102.36 80.71,-57.09 118.11,-57.09 118.11,-102.36 80.71,-102.36

## Polygon pours and split planes (outlines as drawn)
GND on Inner Layer 3 "Inner Layer 3-GND" (solid, remove dead copper, pour order 5): 434.28,485.56 434.28,-337.51 -827.87,-337.51 -827.87,485.56
SW on Inner Layer 3 "Inner Layer 3-SW" (solid, remove dead copper, pour order 0): 135.83,190.94 144.69,199.8 171.26,199.8 204.23,232.78 257.87,232.78 257.87,175.2 232.28,149.61 131.89,149.61 97.44,115.16 -100.39,115.16 -100.39,183.07 -92.52,190.94
GND on Inner Layer 2 "Inner Layer 2-GND" (solid, remove dead copper, pour order 4): 468.73,516.56 468.73,-368.49 -858.87,-368.49 -858.87,516.56
VDD_5V on Inner Layer 2 "Inner Layer 2-VDD_5V" (solid, remove dead copper, pour order 1): -151.57,314.96 -143.7,307.09 -59.06,307.09 -59.06,244.09 -460.63,244.09 -460.63,299.21 -439.96,319.88 -173.23,319.88 -168.31,314.96
GND on Top "Top-GND" (solid, remove dead copper, pour order 2): 492.83,538.95 492.83,-389.16 -889.86,-389.16 -889.86,538.95
GND on Bottom "Bottom-GND" (solid, remove dead copper, pour order 3): 391.23,452.85 391.23,-299.62 -786.55,-299.62 -786.55,452.85

## Keep-outs
Bottom:
  region: 114.08,-168.9 237.89,-168.9 237.89,-202.03 114.08,-202.03 114.08,-168.9
Keep-Out Layer:
  lines w3.94: 233.79,370.26 ccw(c256.05,378.15) 278.33,370.3 278.32,370.27 cw(c289.47,366.33) 289.47,378.15 295.42,378.15 cw(c295.42,366.33) 307.23,366.35 307.23,161.61 ccw(c326.92,161.61) 326.92,141.93 334.79,141.93 cw(c334.79,122.24) 354.48,122.24 354.48,7.35 cw(c342.67,7.35) 340.51,-4.27 330.53,-4.03 ccw(c334.8,-35.24) 340.54,-66.21 340.51,-66.21 cw(c342.67,-77.82) 354.48,-77.82 354.48,-216.34 cw(c334.79,-216.34) 334.79,-236.03 -578.59,-236.03 cw(c-578.59,-216.34) -598.28,-216.34 -598.28,-210.44 ccw(c-621.9,-210.44) -615.47,-187.71 -615.45,-187.71 cw(c-610.09,-168.77) -629.77,-168.77 -629.77,358.46 cw(c-610.09,358.46) -610.09,378.15 -180.23,378.15 cw(c-180.23,366.34) -168.62,364.18 -168.85,354.19 ccw(c-137.65,358.46) -106.68,364.2 -106.68,364.18 cw(c-95.04,366.32) -95.06,378.15 222.64,378.15 cw(c222.64,366.33) 233.78,370.27 ; 233.78,370.27 233.79,370.26

## Other copper
Top:
  region net SW2_VDD3V3: -346.46,354.33 -226.38,354.33 -226.38,301.18 -322.83,301.18 -330.71,293.31 -346.46,293.31 -346.46,354.33
  region net VDD_5V: -470.47,279.53 -413.39,279.53 -413.39,234.25 -470.47,234.25 -470.47,279.53
  region net SW: 220.47,318.9 285.43,318.9 285.43,86.61 206.69,86.61 206.69,177.17 220.47,190.94 220.47,318.9
  region net VDD_1V9: 19.69,31.21 96.46,31.21 96.46,-3.94 19.69,-3.94 19.69,31.21
  region net SW2_VDD3V3: -175.2,-74.8 -62.99,-74.8 -62.99,-94.49 -175.2,-94.49 -175.2,-74.8
  region net ENS1_VDD5V: 147.64,320.87 208.66,320.87 208.66,194.88 147.64,194.88 147.64,320.87
  region net SW1_VDD1V8: -297.24,-27.56 -198.82,-27.56 -183.07,-11.81 -161.42,-11.81 -161.42,-31.5 -171.26,-31.5 -206.69,-66.93 -234.25,-66.93 -234.25,-53.15 -244.09,-43.31 -297.24,-43.31 -297.24,-27.56
  region net NETL4_2: -344.49,262.8 -344.49,285.43 -322.83,285.43 -313.98,294.29 -259.84,294.29 -259.84,251.97 -320.87,251.97 -331.69,262.8 -344.49,262.8
  region net BOOST_OUT: 29.53,269.69 133.86,269.69 133.86,90.55 70.87,90.55 59.06,102.36 15.75,102.36 15.75,271.65 29.53,271.65 29.53,269.69
  region net VDD_5V: 80.71,-57.09 112.2,-57.09 117.13,-62.01 117.13,-108.27 80.71,-108.27 80.71,-57.09
  region net VBAT: -446.85,212.6 -401.57,212.6 -401.57,196.85 -413.39,185.04 -446.85,185.04 -446.85,212.6
  region net ENS1_VDD3V3: -43.31,-74.8 29.53,-74.8 29.53,-92.52 -51.18,-92.52 -51.18,-76.77 -43.31,-76.77 -43.31,-74.8
  region net HVSS: -71.85,273.62 1.97,273.62 1.97,200.79 -11.81,200.79 -11.81,94.49 -8.86,91.54 -8.86,31.5 -86.61,31.5 -86.61,179.13 -71.85,193.9 -71.85,273.62
  region net VDD_5V: -94.49,-135.83 -57.09,-135.83 -49.21,-143.7 -49.21,-216.54 -94.49,-216.54 -94.49,-135.83
Inner Layer 2:
  region net VDD_5V: -470.47,279.53 -411.42,279.53 -411.42,238.19 -431.1,238.19 -435.04,242.13 -456.69,242.13 -462.6,236.22 -470.47,236.22 -470.47,279.53
  region net ENS1_VDD5V: 159.45,307.09 202.76,307.09 202.76,210.63 190.94,198.82 145.67,198.82 145.67,293.31 159.45,307.09
  region net HVSS: -76.77,118.11 -21.65,118.11 -5.91,102.36 -5.91,37.4 -29.53,13.78 -72.83,13.78 -83.66,24.61 -83.66,120.08 -76.77,120.08 -76.77,118.11
  region net SW2_VDD3V3: -305.12,356.3 -204.72,356.3 -204.72,326.77 -305.12,326.77 -305.12,356.3
  region net VDD_5V: 78.74,-57.09 118.11,-57.09 118.11,-104.33 78.74,-104.33 78.74,-57.09
  region net SW: 213.58,267.72 251.97,267.72 253.94,265.75 253.94,86.61 202.76,86.61 202.76,177.17 213.58,187.99 213.58,267.72
  region net VDD_1V9: -242.13,167.32 -196.85,167.32 -121.06,91.54 -121.06,-27.56 -131.89,-27.56 -147.64,-11.81 -147.64,92.52 -175.2,120.08 -228.35,120.08 -242.13,133.86 -242.13,167.32
  region net VDD_1V9: -135.83,1.97 -7.87,1.97 18.7,28.54 33.46,28.54 33.46,-1.97 19.69,-15.75 -135.83,-15.75 -135.83,1.97
  region net SW1_VDD1V8: -212.6,88.58 -177.17,88.58 -168.31,79.72 -168.31,43.31 -188.98,43.31 -212.6,66.93 -212.6,88.58
  region net VBAT: -438.98,214.57 -395.67,214.57 -388.78,207.68 -388.78,187.01 -448.82,187.01 -448.82,204.72 -438.98,214.57
Inner Layer 3:
  region net VDD_5V: 80.71,293.31 129.92,293.31 129.92,226.38 80.71,226.38 80.71,293.31
  region net VDD_1V9: -320.87,348.43 -299.21,348.43 -299.21,303.15 -223.43,227.36 -223.43,157.48 -237.7,143.21 -253.94,143.21 -253.94,214.57 -299.21,259.84 -320.87,259.84 -320.87,348.43
  region net VDD_5V: -145.67,301.18 -72.83,301.18 -72.83,251.97 -145.67,251.97 -145.67,301.18
  region net HVSS: -61.02,106.3 -5.91,106.3 -5.91,11.81 -61.02,11.81 -61.02,106.3
  region net SW2_VDD3V3: -276.33,354.33 -210.63,354.33 -203.74,347.44 -203.74,305.12 -211.12,297.74 -265.75,297.74 -276.33,308.32 -276.33,354.33
  region net ENS1_VDD3V3: 35.43,-147.64 192.91,-147.64 192.91,-175.2 53.15,-175.2 35.43,-157.48 35.43,-147.64
  region net ENS1_VDD5V: 157.48,303.15 222.44,303.15 231.3,294.29 231.3,244.09 192.91,244.09 166.34,217.52 139.76,217.52 139.76,285.43 157.48,303.15
  region net VBAT: -405.51,147.64 -368.11,147.64 -357.28,136.81 -357.28,94.49 -405.51,94.49 -405.51,147.64
  region net SW1_VDD1V8: -464.57,307.09 -421.26,307.09 -415.35,301.18 -415.35,271.65 -464.57,271.65 -464.57,307.09
  region net V_CHG_IN: -196.85,285.43 -171.26,285.43 -171.26,244.09 -200.79,244.09 -202.76,246.06 -202.76,279.53 -196.85,285.43
Bottom:
  region net AVSS: 115.75,164.72 140.3,164.72 140.3,131.59 115.75,131.59 115.75,164.72
  region net SW: 84.65,169.29 107.59,169.29 107.59,125.98 84.65,125.98 84.65,169.29
  region net ENS1_VDD5V: 149.61,116.14 149.61,194.88 155.51,200.79 155.51,212.6 144.69,223.43 144.69,250 161.42,250 161.42,301.18 230.32,301.18 230.32,271.65 210.63,271.65 210.63,159.45 188.98,159.45 188.98,143.7 161.42,116.14 149.61,116.14
  region net SW: -11.81,167.32 43.31,167.32 43.31,124.02 -11.81,124.02 -11.81,167.32
  region net NETR12_1: -314.96,196.85 -271.65,196.85 -271.65,114.17 -344.49,114.17 -344.49,187.01 -338.58,192.91 -314.96,192.91 -314.96,196.85
  region net SW1_VDD1V8: -478.35,348.43 -425.2,348.43 -425.2,277.56 -435.04,267.72 -478.35,267.72 -478.35,348.43
  region net VBAT: -411.42,167.32 -360.24,167.32 -360.24,108.27 -411.42,108.27 -411.42,167.32
  region net BOOST_OUT: -137.8,19.69 -137.8,43.31 -173.23,43.31 -173.23,116.14 -139.76,116.14 -114.17,141.73 -114.17,173.23 -43.31,173.23 -43.31,137.8 -19.68,137.8 -19.68,171.26 -15.75,175.2 45.28,175.2 50.2,170.28 50.2,133.86 76.77,133.86 76.77,204.72 71.85,209.65 71.85,269.69 -11.81,269.69 -61.02,220.47 -155.51,220.47 -200.79,175.2 -200.79,19.69 -137.8,19.69
  region net AVSS: 222.44,224.41 253.94,224.41 253.94,139.76 281.5,139.76 281.5,98.43 222.44,98.43 222.44,224.41
  region net SW2_VDD3V3: -285.43,348.43 -208.66,348.43 -208.66,309.06 -246.06,271.65 -285.43,271.65 -285.43,348.43
  region net VCC_1V8: -288.39,255.91 -257.87,255.91 -213.58,211.61 -213.58,114.17 -255.91,114.17 -255.91,204.72 -288.39,237.2 -288.39,255.91
  region net VDD_5V: 82.68,293.31 129.92,293.31 129.92,222.44 82.68,222.44 82.68,293.31
  region net SW: -106.3,165.35 -53.15,165.35 -53.15,124.02 -106.3,124.02 -106.3,165.35

## Silkscreen, mask and mechanical layers (free items; w line width, h text height)
Silkscreen Top:
  text "SCL" at -495.24,124.65 h19.68 r90
  text "SDA" at -619.61,84.84 h19.68
  text "-" at -246.6,-161 h19.68
  text "+" at -40.14,-163.98 h19.68
Silkscreen Bottom:
  text "GND" at 129.92,281.5 h9.84
  text "ESN1" at 25.59,279.53 h9.84
  text "CSLK" at 76.77,279.53 h9.84
  text "3V3" at -26.43,277.59 h9.84
  text "+" at -415.35,250 h15.75
  text "-" at -381.89,250 h15.75
  text "+" at -238.19,250 h15.75
  text "-" at -574.8,248.03 h15.75
  text "GND" at -66.75,206.59 h5.91
  text "VBUS" at -142.28,205.92 h5.91
  text "Apollo_ES_Board-V1.1" at -494.09,106.3 h17.72 r90
  text "TX" at -429.13,-163.39 h19.68
  text "RX" at -431.1,-208.66 h19.68
Paste Mask Top:
  lines w0.1: -54.21,211.29 -50.27,207.35 0.32,207.35 4.26,211.29 4.26,225.87 0.32,229.8 -11.68,229.8 -15.62,233.74 -15.62,249 -11.68,252.93 0.32,252.93 4.26,256.87 4.26,271.45 0.32,275.38 -50.27,275.38 -54.21,271.45 -54.21,211.29 ; 71.19,211.29 75.12,207.35 125.71,207.35 129.65,211.29 129.65,271.45 125.71,275.38 75.12,275.38 71.19,271.45 71.19,256.87 75.12,252.93 87.13,252.93 91.06,249 91.06,233.74 87.13,229.8 75.12,229.8 71.19,225.87 71.19,211.29
Solder Mask Top:
  region: -535.15,161.81 -536.62,172.96 -540.92,183.36 -547.77,192.28 -556.69,199.13 -567.09,203.44 -578.24,204.91 -589.4,203.44 -599.79,199.13 -608.71,192.28 -615.56,183.36 -619.87,172.96 -621.34,161.81 -619.87,150.66 -615.56,140.26 -608.71,131.34 -599.79,124.49 -589.4,120.18 -578.24,118.72 -567.09,120.18 -556.69,124.49 -547.77,131.34 -540.92,140.26 -536.62,150.66 -535.15,161.81 -535.52,161.81
  region: -163.39,395.67 125.98,395.67 125.98,301.18 -171.26,301.18 -208.66,338.58 -208.66,397.64 -163.39,397.64 -163.39,395.67
  region: 389.5,-38.02 388.38,-26.64 385.06,-15.7 379.67,-5.61 372.41,3.23 363.58,10.48 353.49,15.87 342.55,19.19 331.17,20.31 319.79,19.19 308.85,15.87 298.76,10.48 289.92,3.23 282.67,-5.61 277.28,-15.7 273.96,-26.64 272.84,-38.02 273.96,-49.4 277.28,-60.34 282.67,-70.43 289.92,-79.26 298.76,-86.52 308.85,-91.91 319.79,-95.23 331.17,-96.35 342.55,-95.23 353.49,-91.91 363.58,-86.52 372.41,-79.26 379.67,-70.43 385.06,-60.34 388.38,-49.4 389.5,-38.02 389.22,-38.02
  region: -635.83,66.93 -584.65,66.93 -584.65,15.75 -549.21,15.75 -549.21,-84.65 -635.83,-84.65 -635.83,66.93
Solder Mask Bottom:
  region: 293.31,23.62 364.17,23.62 364.17,-242.13 293.31,-242.13 293.31,23.62
  region: -81.96,350.5 -83.86,364.94 -89.44,378.39 -98.3,389.94 -109.85,398.8 -123.31,404.38 -137.74,406.28 -152.18,404.38 -165.63,398.8 -177.18,389.94 -186.05,378.39 -191.62,364.94 -193.52,350.5 -191.62,336.06 -186.05,322.61 -177.18,311.06 -165.63,302.19 -152.18,296.62 -137.74,294.72 -123.31,296.62 -109.85,302.19 -98.3,311.06 -89.44,322.61 -83.86,336.06 -81.96,350.5 -82.44,350.5
  region: -633.86,236.22 -533.46,236.22 -533.46,-240.16 -633.86,-240.16 -633.86,236.22
Mechanical 1:
  circle w0.5: c-578.59,161.61 r31.5
Drill Drawing:
  lines w7.87: 7446.12,-3425.25 8552.41,-3425.25 ; 7450.05,-3539.42 8556.35,-3539.42 ; 7457.93,-3838.64 8564.23,-3838.64 ; 7461.86,-3952.81 8568.16,-3952.81
  lines w10: 4198.79,-4149.74 6998.79,-4149.74 7198.79,-4149.74 ; 4198.79,-3949.74 6998.79,-3949.74 ; 4198.79,-3749.74 6998.79,-3749.74 7198.79,-3749.74 ; 4198.79,-3549.74 7198.79,-3549.74 ; 4198.79,-3349.74 7198.79,-3349.74 ; 4198.79,-3149.74 6998.79,-3149.74 9248.79,-3149.74 ; 4198.79,-2949.74 6998.79,-2949.74 9248.79,-2949.74 ; 4198.79,-2749.74 6998.79,-2749.74 9248.79,-2749.74 ; 4198.79,-1949.74 6998.79,-1949.74 9248.79,-1949.74 ; 4198.79,-1749.74 6998.79,-1749.74 ; 4198.79,-1549.74 6998.79,-1549.74 9248.79,-1549.74 ; 4198.79,-1349.74 6998.79,-1349.74 9248.79,-1349.74 ; 5148.79,-3149.74 5148.79,-1349.74 ; 5148.79,-2549.74 6998.79,-2549.74 7198.79,-2549.74 ; 5148.79,-2349.74 6998.79,-2349.74 9248.79,-2349.74 ; 5148.79,-2149.74 6998.79,-2149.74 7198.79,-2149.74 ; 5298.79,-2749.74 5298.79,-1949.74 ; 5439.34,-1950.92 5439.34,-1752.89 ; 5598.79,-1549.74 5598.79,-1349.74 ; 5601.94,-1950.92 5601.94,-1750.52 ; 6948.79,-3949.74 7198.79,-3949.74 ; 6948.79,-1749.74 9248.79,-1749.74 ; 7198.79,-4349.74 7198.79,-3149.74 7198.79,-1349.74 ; 7698.79,-2349.74 7698.79,-1949.74 ; 7698.79,-2149.74 9248.79,-2149.74 ; 7748.79,-2749.74 7748.79,-2349.74 ; 7748.79,-2549.74 9248.79,-2549.74 ; 7798.79,-1949.74 7798.79,-1749.74 ; 7898.79,-2349.74 7898.79,-2149.74 ; 8198.79,-2349.74 8198.79,-2149.74 ; 8198.79,-1749.74 8198.79,-1549.74 8198.79,-1349.74 ; 8398.79,-2349.74 8398.79,-2149.74 ; 8648.79,-2349.74 8648.79,-2149.74 ; 8848.79,-2349.74 8848.79,-2149.74 ; 4198.79,-4349.74 4198.79,-1149.74 9248.79,-1149.74 9248.79,-4349.74 4198.79,-4349.74
  lines w12: 5438.79,-1549.74 5438.79,-1349.74
  text "MANUFACTURE DETAIL" at 5893.79,-1299.74 h90
  text "Board Thickness(mm)" at 4243.79,-1499.74 h50
  text "According to the layers build-up" at 5693.79,-1499.74 h50
  text "Thickness Tolerance" at 7293.79,-1499.74 h50
  text "Below +10%" at 8393.79,-1499.74 h50
  text "0.8mm" at 5169.71,-1505.21 h50
  text "-" at 8673.79,-1534.74 h50
  text "Board Material" at 4243.79,-1699.74 h50
  text "Conventional FR-4" at 5443.79,-1699.74 h50
  text "Distorted Degree" at 7293.79,-1699.74 h50
  text "Below 0.01mm/mm" at 8293.79,-1699.74 h50
  text "X" at 5502.79,-1885.74 h50
  text "Copper Thickness" at 4243.79,-1899.74 h50
  text "According to the layers build-up" at 5693.79,-1899.74 h50
  text "Silkscreen" at 7293.79,-1899.74 h50
  text "Insulative Ink    Color:White" at 7943.79,-1899.74 h50
  text "Hot Air Levelling" at 5343.79,-2099.74 h60
  text "Soldmask" at 7293.79,-2099.74 h50
  text "Liquid Sensitive Film" at 7943.79,-2099.74 h50
  text "Green" at 8418.75,-2281.3 h50
  text "ELECTROLESS NICKEL\IMMERSION GOLD" at 5343.79,-2299.74 h50
  text "Require" at 7293.79,-2299.74 h50
  text "X" at 7793.79,-2299.74 h50
  text "Available Finishes" at 4243.79,-2449.74 h60
  text "IPC-A-600E" at 8224.97,-2479.66 h50
  text "Electrolytic Nickel&Gold" at 5343.79,-2499.74 h60
  text "Inspection" at 7293.79,-2499.74 h50
  text "X" at 5206.67,-2680.05 h50
  text "IPC-6012A" at 8244.79,-2681.74 h50
  text "OSP+ENIG" at 5343.79,-2699.74 h50
  text "Standard" at 7293.79,-2699.74 h50
  text "Drill Note" at 4393.79,-2899.74 h60
  text "Holes Size are after plating" at 5343.79,-2899.74 h50
  text "Packet Require:" at 7293.79,-2899.74 h50
  text "10PCS IN ONE PACKAGE" at 8093.79,-2899.74 h50
  text "BUILD UP OF LAYERS" at 4243.79,-3099.74 h50
  text "According To The Layermark" at 5443.79,-3099.74 h60
  text "Layer Build_up" at 7743.79,-3099.74 h75
  text "Other Notes For The Pcb During Manufacture" at 4443.79,-3299.74 h60
  text "1/3 OZ" at 8587.85,-3448.87 h50
  text "Fill the vias with green oil" at 4456.79,-3481.74 h50
  text "1" at 4293.79,-3499.74 h50
  text "0.078mm FR4" at 7674.46,-3511.86 h50
  text "1/2 OZ" at 8595.72,-3559.11 h50
  text "2" at 4293.79,-3699.74 h50
  text "Mark the manufacturer's logo on the unit" at 4443.79,-3699.74 h50
  text "0.3mm CORE" at 7660.68,-3704.78 h50
  text "1/2 OZ" at 8607.53,-3858.32 h50
  text "The osp aera is pad of BGA chip" at 4442.18,-3878.01 h50
  text "3" at 4293.79,-3899.74 h50
  text "0.078mm FR4" at 7674.46,-3929.19 h50
  text "1/3 OZ" at 8607.53,-3984.3 h50
  text "4" at 4293.79,-4099.74 h50
  text "5" at 4293.79,-4299.74 h50
Mechanical 5:
  drawing of 197 lines, arcs and shapes, not listed
Mechanical 6:
  drawing of 2062 lines, arcs and shapes, not listed